# EAGLE board master_node_leonardo (EAGLE 6.5.0)
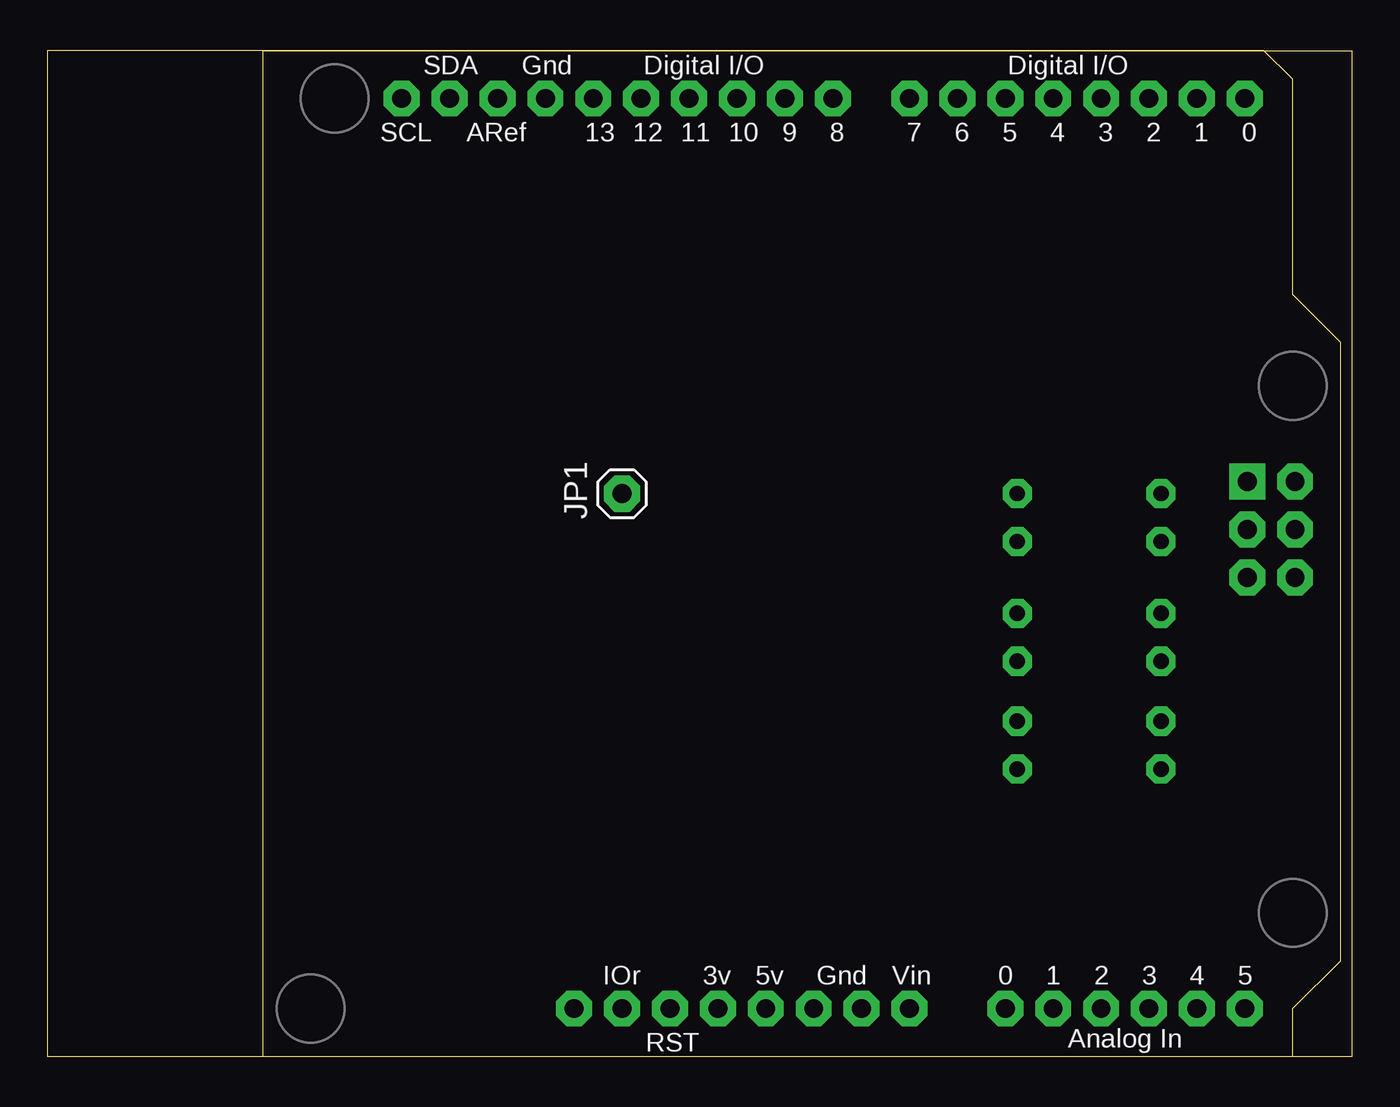
[diagram p0: board, top side]
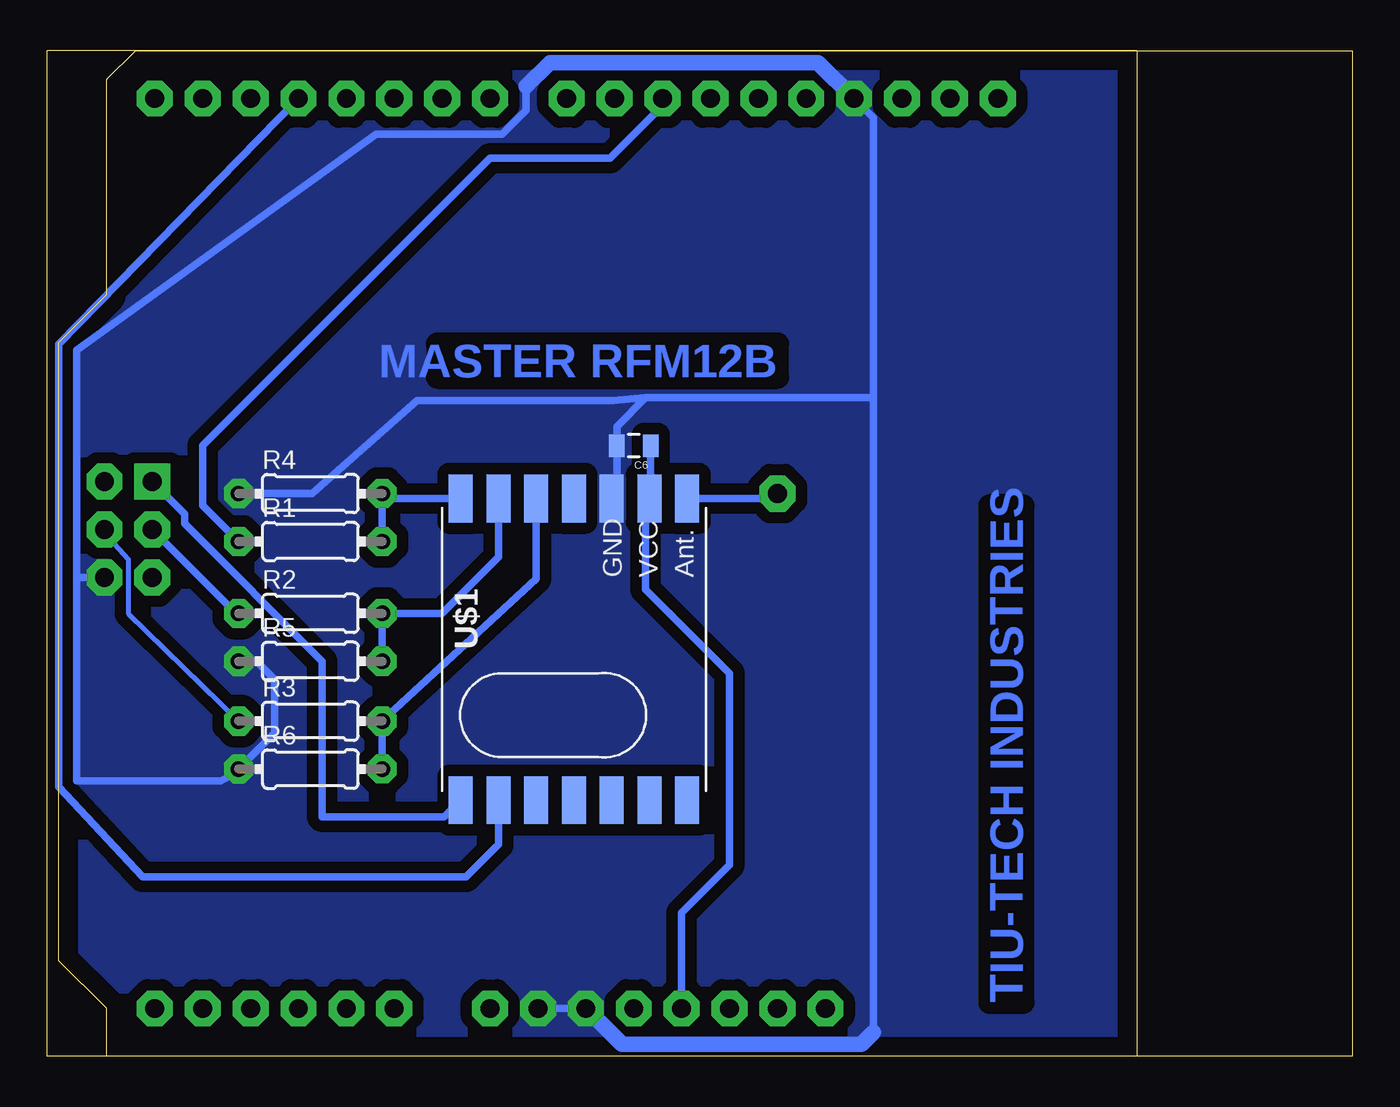
[diagram p1: board, bottom side, seen from below]

Size 69.2 x 53.34 mm. Coordinates in mm from the lower left corner, seen from the top.
Outline: 69.2,53.33 69.2,0 11.43,0 11.43,53.33
Outline: 11.43,53.34 69.2,53.34
Copper layers (1*16): Top 0.035mm / dielectric 1.5mm / Bottom 0.035mm
Design rules "default *": minimum track width 10mil, minimum drill 24mil, track to track 8mil, track to pad 8mil, pad to pad 8mil, via to via 8mil, smd to smd 8mil, copper to edge 40mil, drill to drill 8mil, minimum pad ring 10mil, minimum via ring 8mil, stop-mask expansion 4mil, vias tented up to drill 0mil, thermal gap 10mil

## Footprints (pad centres in the part's own frame; a part is rotated, then mirrored left to right if it is on the bottom)
0805 = smd 0.8 x 1.2: 1 -0.9,0; 2 0.9,0
1X01 = drill 1.016 octagon: 1 0,0
0204/7 = drill 0.813 octagon: 1 -3.81,0; 2 3.81,0
RFM12B = smd 2.54 x 1.27: ANT 8,-6; FFS -8,2; GND 8,-2; IRQ -8,4; P$8 -8,0; P$9 -8,-2; P$10 -8,-4; P$12 -8,-6; P$16 8,0; SCK 8,4; SDI 8,2; SDO -8,6; SEL 8,6; VDD 8,-4
ARDUINOR3_ICSP = drill 1 pad 1.676 octagon: 3V 35.56,2.54; 5V 38.1,2.54; A0 50.8,2.54; A1 53.34,2.54; A2 55.88,2.54; A3 58.42,2.54; A4 60.96,2.54; A5 63.5,2.54; AREF 23.876,50.8; D0 63.5,50.8; D1 60.96,50.8; D2 58.42,50.8; D3 55.88,50.8; D4 53.34,50.8; D5 50.8,50.8; D6 48.26,50.8; D7 45.72,50.8; D8 41.656,50.8; D9 39.116,50.8; D10 36.576,50.8; D11 34.036,50.8; D12 31.496,50.8; D13 28.956,50.8; GND 26.416,50.8; GND@1 43.18,2.54; GND@2 40.64,2.54; IOREF 30.48,2.54; RESERVED 27.94,2.54; RESET 33.02,2.54; SCL 18.796,50.8; SDA 21.336,50.8; VIN 45.72,2.54 | drill 1 pad 1.778 octagon: 5V_ICSP 66.167,30.48; GND@3 66.167,25.4; MOSI 66.167,27.94; RESET_ICSP 63.627,25.4; SCK 63.627,27.94 | drill 1 pad 1.778 square: MISO 63.627,30.48

## Placement (x,y rotation side)
C6  1u  [0805]  38.1,32.38 180 bottom
JP1  ANT  [1X01]  30.48,29.84 90 top
R1  4K7  [0204/7]  55.24,27.3 0 bottom
R2  4K7  [0204/7]  55.24,23.5 0 bottom
R3  4K7  [0204/7]  55.24,17.78 0 bottom
R4  10K  [0204/7]  55.24,29.84 0 bottom
R5  10K  [0204/7]  55.24,20.95 0 bottom
R6  10K  [0204/7]  55.24,15.24 0 bottom
U$1  RFM12B  [RFM12B]  41.27,21.59 90 bottom
U$2  ARDUINO_R3_ICSP  [ARDUINOR3_ICSP]  0,0 0 top

## Library data of the parts
C6 = SparkFun-Passives
JP1 = pinhead
R1-R6 = resistor
U$1 = JeeParts
U$2 = adafruit

## Nets
5V: U$2.5V
+3V3: C6.1 U$1.VDD U$2.3V
GND: C6.2 R4.1 R5.1 R6.1 U$1.GND U$2.GND U$2.GND@1 U$2.GND@2 U$2.GND@3
IRQ: U$1.IRQ U$2.D3
MISO: U$1.SDO U$2.MISO
MOSI: R3.1 U$2.MOSI
N$7: JP1.1 U$1.ANT
N$35: R3.2 R6.2 U$1.SDI
N$36: R2.2 R5.2 U$1.SCK
N$37: R1.2 R4.2 U$1.SEL
SCK: R2.1 U$2.SCK
SS: R1.1 U$2.D10
VIN: U$2.VIN

## Tracks (layer width: path | path; a pad name or v marks a point on that pad's centre or on a via)
+3V3
  Bottom 0.406: C6.1 37.2,29.66 U$1.VDD 37.47,29.4 37.47,24.77 33.02,20.32 33.02,10.16 35.56,7.62 U$2.3V
GND
  Bottom 0.406: U$2.GND@1 U$2.GND@2 | 37.47,34.92 39,33.39 C6.2 39,29.86 U$1.GND 39.37,29.5 | 37.47,34.92 25.4,34.92 | 25.4,1.27 25.4,34.92 | 25.4,34.92 25.4,49.78 U$2.GND | 43.81,51.44 43.81,50.16 45.09,48.9 51.75,48.9 67.63,37.47 67.63,25.4 | R4.1 55.15,29.84 49.59,34.77 39.21,34.77 37.47,34.92 | 67.63,25.4 67.63,14.61 60.01,14.61 59.37,14.92 R6.1 57.15,17.14 57.15,20 58.1,20.95 R5.1 | U$2.GND@3 67.63,25.4
  Bottom 0.813: 25.4,1.27 26.04,0.64 38.73,0.64 U$2.GND@2 | 43.81,51.44 42.55,52.7 28.32,52.7 U$2.GND
  pour Bottom (isolate 0.61, no thermals): 11.43,53.34 69.22,53.34 69.22,0 11.43,0
IRQ
  Bottom 0.406: U$1.IRQ 45.27,11.24 46.99,9.53 64.14,9.53 68.58,14.29 68.58,37.78 U$2.D3
MISO
  Bottom 0.406: U$1.SDO 48.16,12.7 54.61,12.7 54.61,20.95 61.91,28.26 61.91,28.77 U$2.MISO
MOSI
  Bottom 0.254: U$2.MOSI 66.17,27.75 64.9,26.35 64.9,23.5 R3.1
N$7
  Bottom 0.406: U$1.ANT 30.73,29.59 JP1.1
N$35
  Bottom 0.406: U$1.SDI 43.27,25.3 R3.2 R6.2
N$36
  Bottom 0.406: R5.2 R2.2 48.26,23.5 45.27,26.48 U$1.SCK
N$37
  Bottom 0.406: R1.2 R4.2 51.18,29.59 U$1.SEL
SCK
  Bottom 0.406: R2.1 59.18,23.5 U$2.SCK
SS
  Bottom 0.406: U$2.D10 36.58,50.42 39.37,47.62 45.72,47.62 60.96,32.38 60.96,29.21 R1.1

## Text on the board
Bottom: MASTER RFM12B | TIU-TECH INDUSTRIES